# Altium PCB Sonar_Gonderici_PCB2.PcbDoc
Units mm, origin at the board's own origin, x right, y up, seen from the top; angles counter-clockwise.
Board outline 47 x 55 mm, 2 copper layers (Top Layer, Bottom Layer); 8 components, 7 nets, 43 pads, 0 vias.
Unrouted connection lines stored in the file: 2.
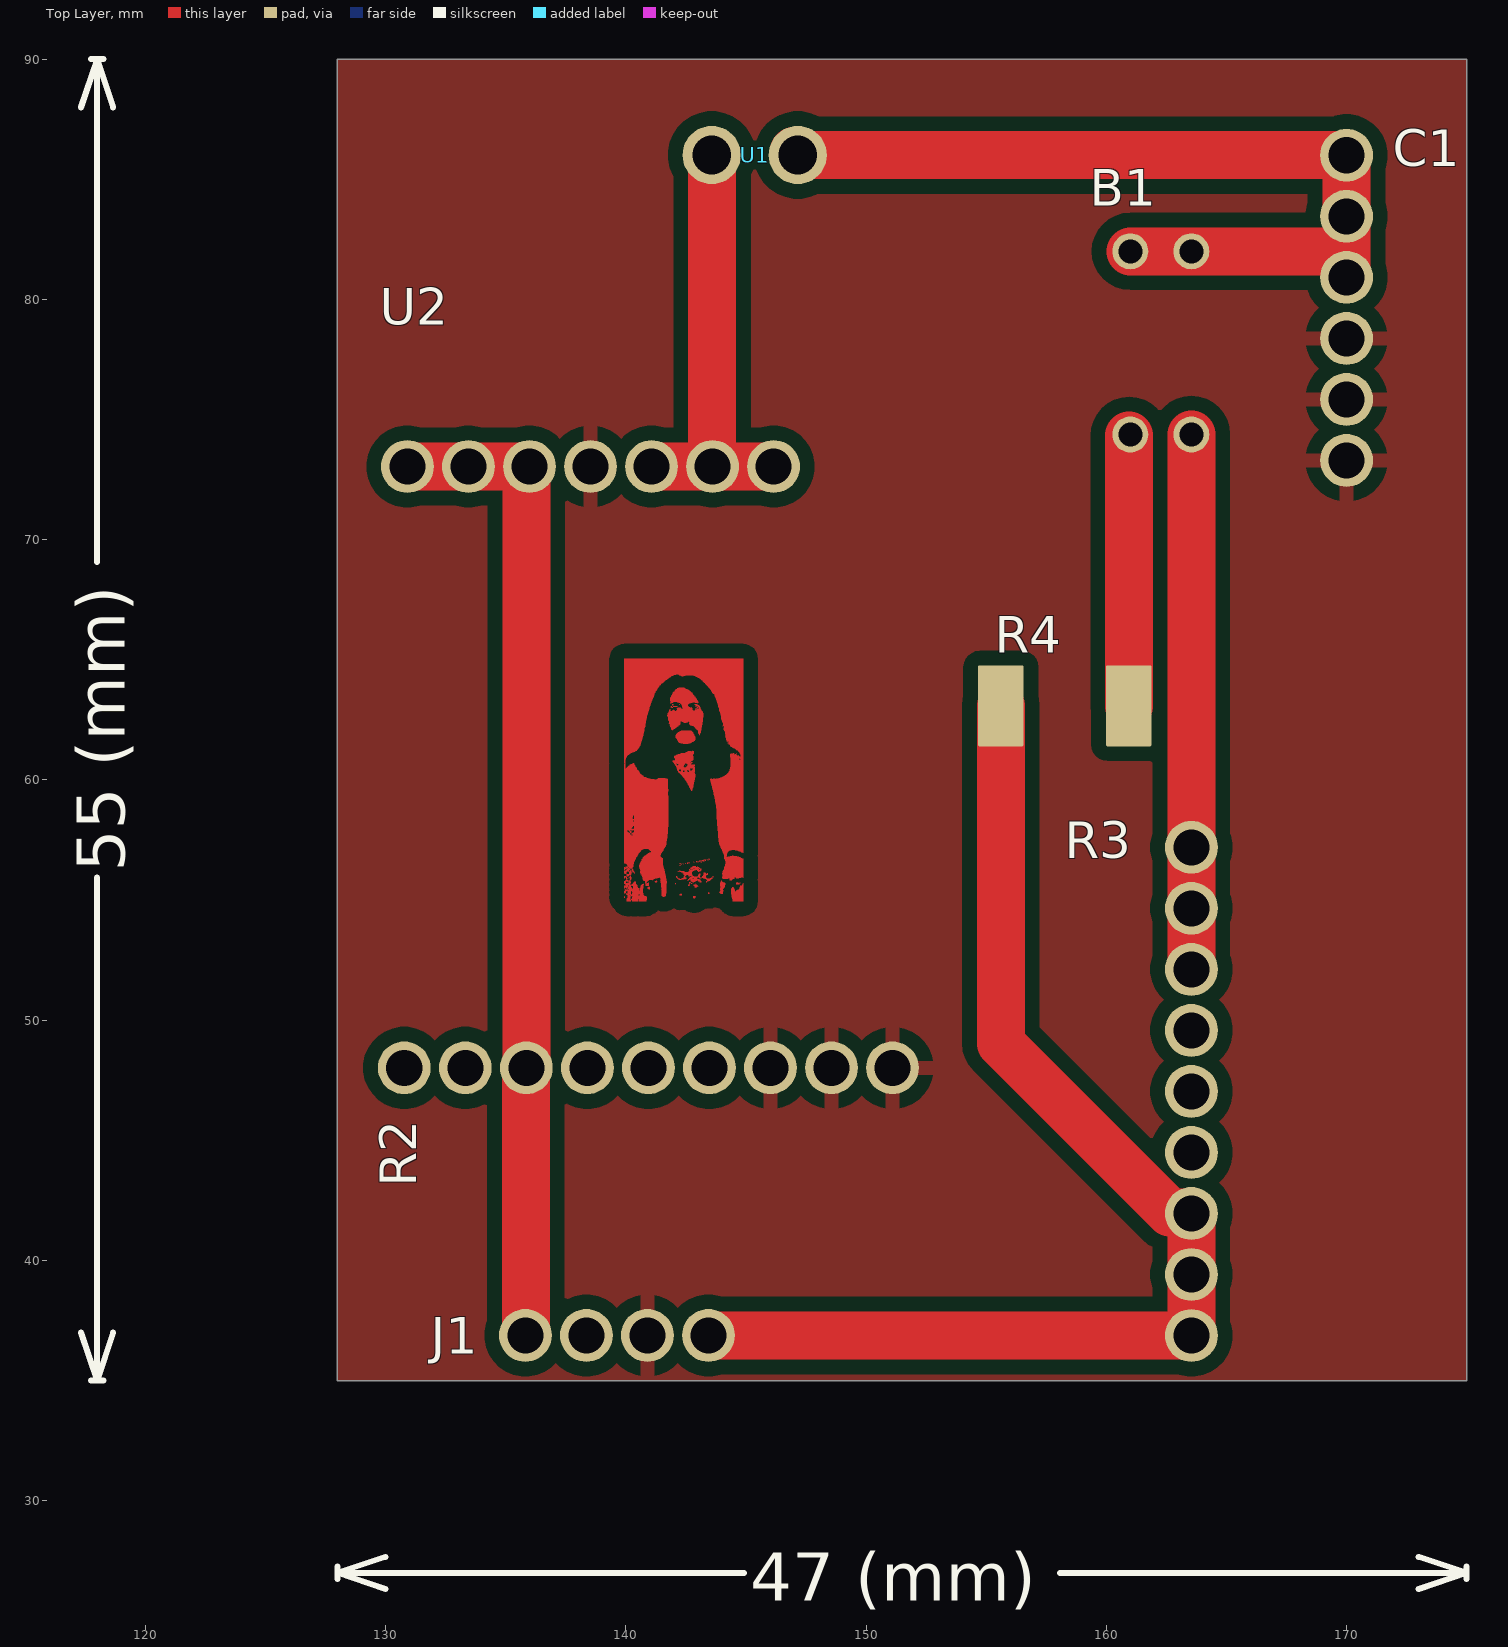
[diagram p0: Top Layer view]
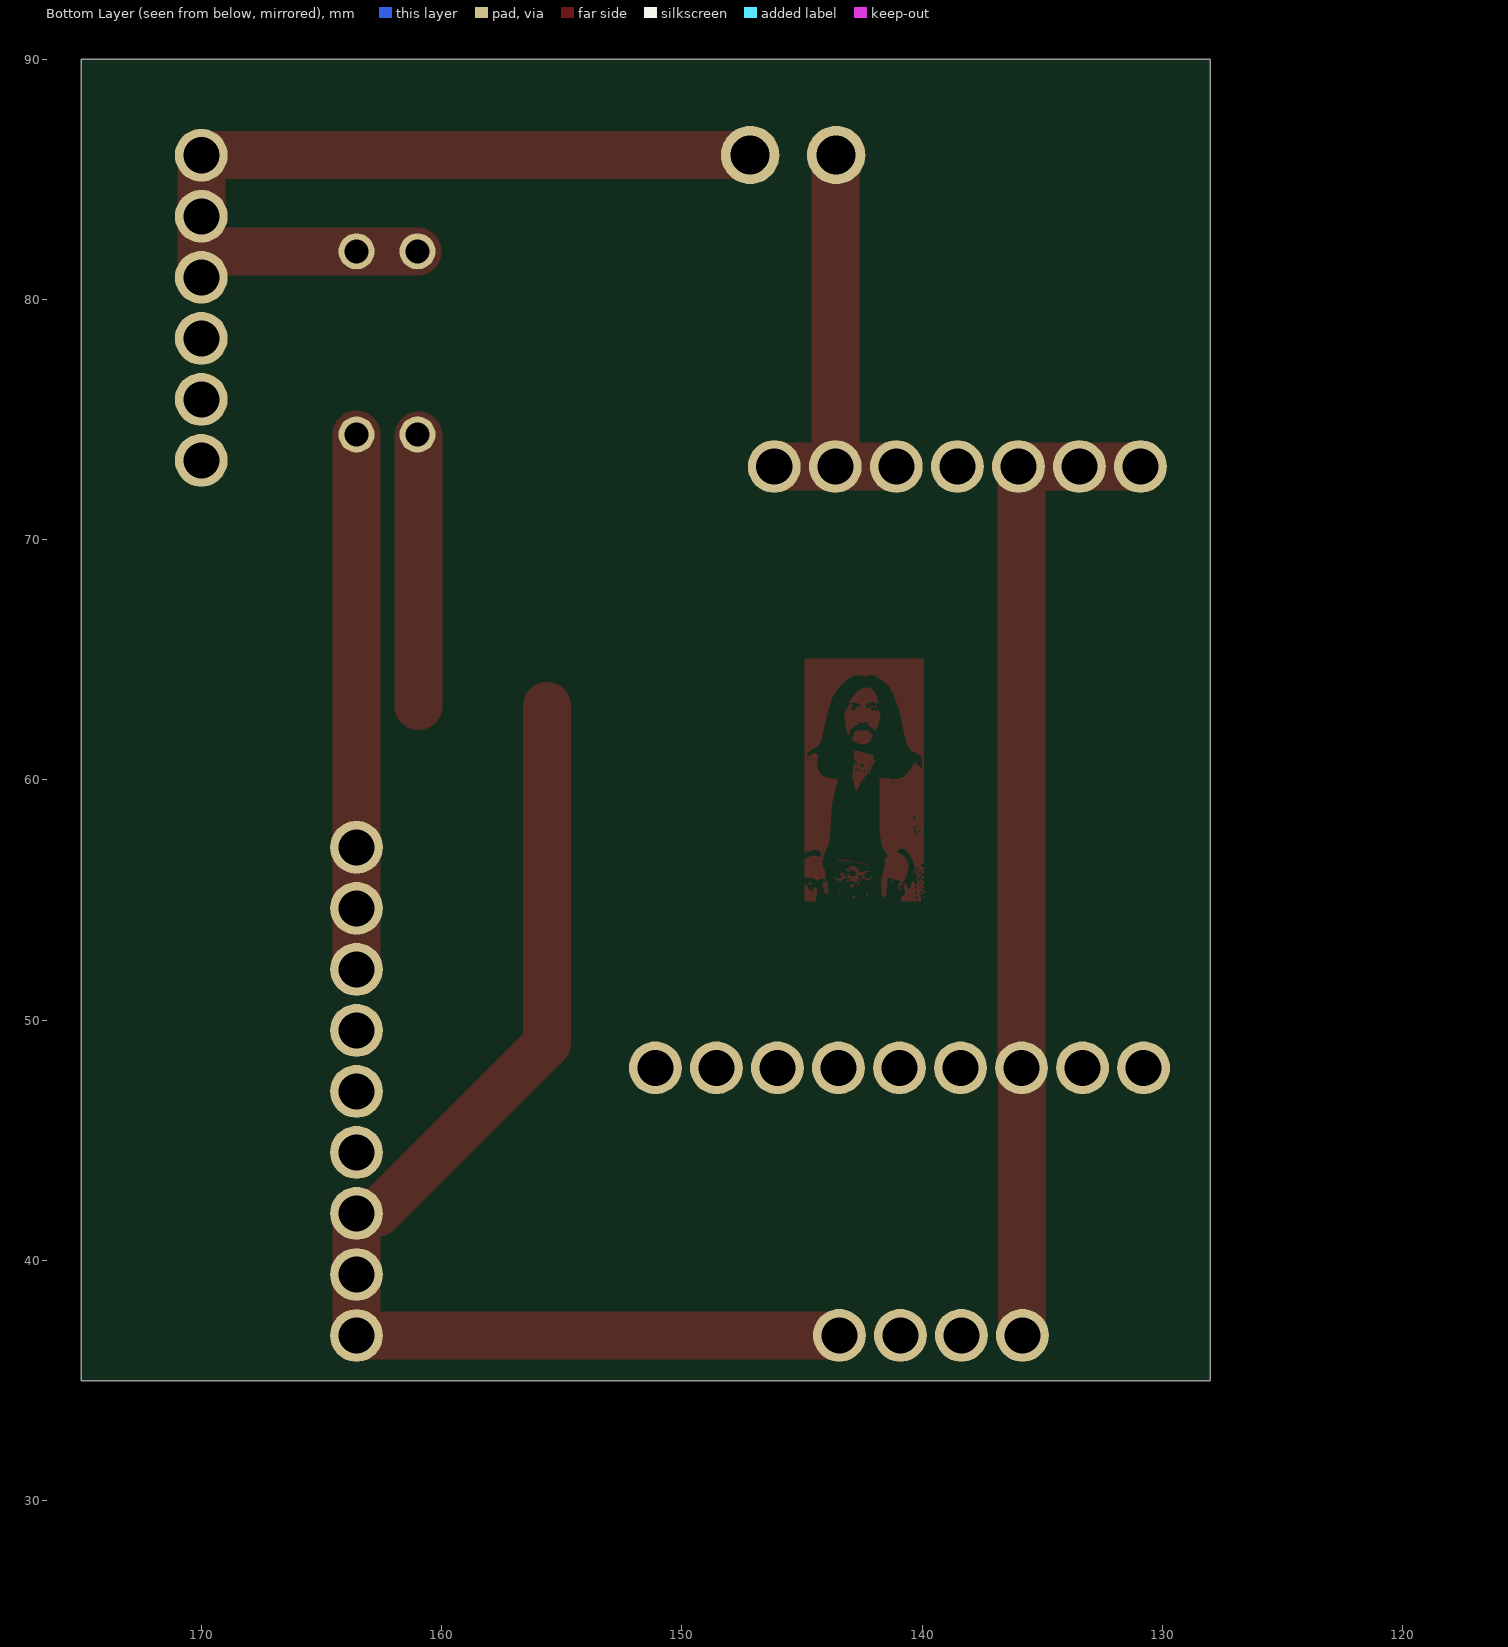
[diagram p1: Bottom Layer view, seen from below]
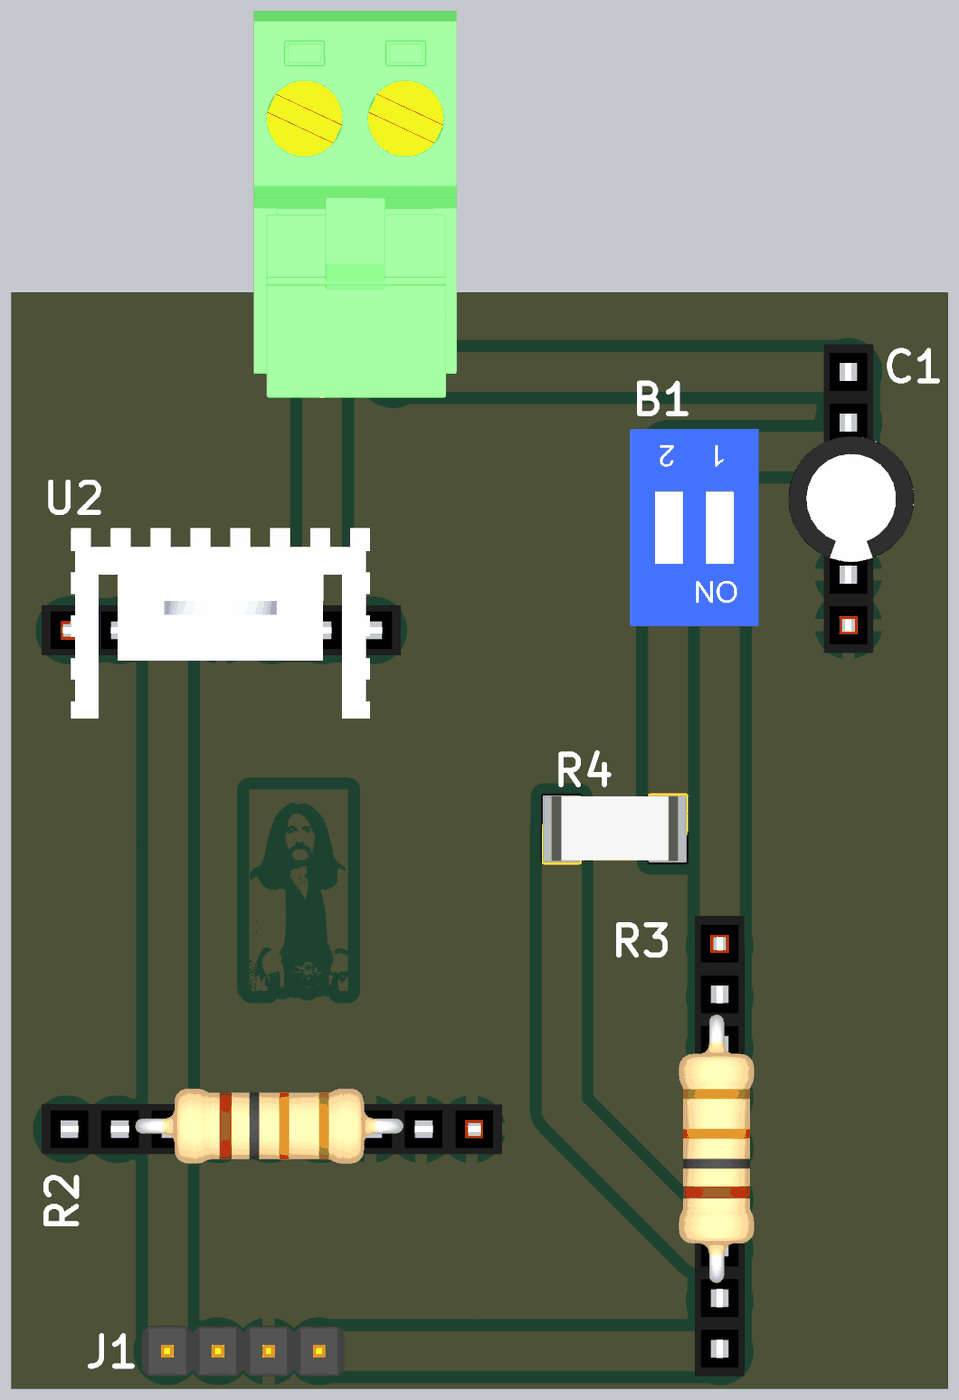
[diagram p2: 3D render of the assembled board from above, using the file's embedded part models]

## Layer stack, top to bottom
Top Solder: solder mask 0.0102, Solder Resist, Dk 3.5
Top Layer: signal copper 0.0356
Dielectric 1: dielectric 0.32, FR-4, Dk 4.8
Bottom Layer: signal copper 0.0356
Bottom Solder: solder mask 0.0102, Solder Resist, Dk 3.5

## Board outline
128,35 128,90 175,90 175,35

## Design rules (kind name [scope] priority, off if disabled: settings)
Clearance [All] p1: gap=0.6 ignorepadtopadclearanceinfootprint=FALSE
PolygonConnect [All] p1: connectstyle=Relief reliefconductorwidth=0.6 reliefentries=4 polygonreliefangle="90 Angle" airgapwidth=0.6
RoutingVias [All] p1: holewidth=0.711 width=1.27 viastyle="Through Hole" minholewidth=0.711 minwidth=1.27 maxholewidth=0.711 maxwidth=1.27
SolderMaskExpansion [All] p1: expansion=0.102 istentingtop=FALSE
Width [All] p1: maxlimit=3 minlimit=1 preferedwidth=1.5 minimp=50.000000 maximp=50.000000 favimp=50.000000
30 further rules are at their usual default settings.

## Classes and differential pairs
component class Sonar_Gonderici_Sheet1: B1 C1 J1 R2 R3 R4 U1

## Components (designator, comment, footprint, x,y, rotation, side; value= is the part's Value field where it differs from the comment)
B1 "2 Pin Switch" "2 Pin Switch" 163.54,74.38 r180 top
C1 "Tht Cap" "THT CAP POL" 170,83.46 r270 top
J1 "Header" Header 135.823,36.882 r0 top
R2 "Tht Res" "THT Res" 148.561,48.019 r180 top
R3 "Tht Res" "THT Res" 163.54,54.658 r270 top
R4 "Smd Res" RESC1005X40 155.612,63.083 r0 top
U1 "Transformator" Transfornator 147.158,86.01 r180 top
U2 "Logic_Mosfet" Logic_Mosfet 138.532,73.044 r0 top

## Footprints (in the part's own frame and the unit in brackets; to place one, negate y for a bottom-side part, rotate by r counter-clockwise, add the part's x,y. Pads: shape width x height; smd on the part's side, far side on the other; paste and mask are expansions set on the pad)
"2 Pin Switch" [mm]
  round 1.5 hole 1: 1(0,0) 2(2.54,0) 3(0,-7.62) 4(2.54,-7.62)
  body extent -1.95,-8.76 4.49,1.14, height 6.7
Header [mm]
  round 2.2 hole 1.5: 1(0,0) 2(2.54,0) 3(5.08,0) 4(7.62,0)
  body extent -1.27,-1.27 8.89,1.27, height 9.5
Logic_Mosfet [mm]
  round 2.2 hole 1.5: 1(-7.62,0) 2(-5.08,0) 3(-2.54,0) 4(0,0) 5(2.54,0) 6(5.08,0) 7(7.62,0)
  body extent -9.02,-4.42 9.01,5.13, height 29.8
RESC1005X40 [mm]
  rrect7% 1.9x3.37 smd: 1(0,0) 2(5.32,0)
  body extent -0.51,-1.61 5.84,1.65, height 0.58
"THT CAP POL" [mm]
  round 2.2 hole 1.5: 1(-2.54,0) 2(0,0) 3(2.54,0) 4(5.08,0) 5(7.62,0) 6(10.16,0)
  body extent -3.93,-3.02 11.56,3.3, height 8.5
"THT Res" [mm]
  round 2.2 hole 1.5: 1(-2.54,0) 2(0,0) 3(2.54,0) 4(5.08,0) 5(7.62,0) 6(10.16,0) 7(12.7,0) 8(15.24,0) 9(17.78,0)
  body extent -4.06,-2.03 19.05,1.72, height 15.38
Transfornator [mm]
  round 2.43 hole 1.62: 1(0,0) 2(3.58,0)
  body extent -3.17,-18.1 6.99,1.3, height 13.95

## Part data
B1: ComponentLink1Description="Satın Alma Linki", ComponentLink1URL=https://www.direnc.net/2-pin-dip-switch
C1: ComponentLink10Description="Satın Alma Linki", ComponentLink10URL=https://www.direnc.net/47uf16v, ComponentLink11Description="Satın Alma Linki", ComponentLink11URL=https://www.direnc.net/2-pin-508mm-90-gecmeli-takim-klemens, ComponentLink12Description="Satın Alma Linki", ComponentLink12URL=https://www.direnc.net/2-pin-508mm-90-erkek-gecmeli-yesil-klemens-1
J1: ComponentLink1Description="Satın Alma Linki", ComponentLink1URL=https://www.direnc.net/1x40-precision-disi-header, ComponentLink2Description=Datasheet, ComponentLink2URL=https://www.signal.com.tr/pdf/cat/PH1S15_17_25-2XX-L_U.pdf
R2 R3: ComponentLink10Description="Satın Alma Linki", ComponentLink10URL=https://www.robolinkmarket.com/1-4w-4r7-direnc-paketi-10-adet?_sgm_campaign=fcs_9ec70268bc000&_sgm_source=5399%7Cproduct&_sgm_action=search&_sgm_term=diren%C3%A7, ComponentLink11Description="Satın Alma Linki", ComponentLink11URL=https://www.direnc.net/2-pin-508mm-90-erkek-gecmeli-yesil-klemens-1, ComponentLink12Description="Satın Alma Linki", ComponentLink12URL=https://www.direnc.net/2-pin-508mm-90-gecmeli-takim-klemens
R4: ComponentLink10Description="Satın Alma Linki", ComponentLink10URL=https://www.direnc.net/47k-5-1w-2512-smd-direnc, ComponentLink11Description=Datasheet, ComponentLink11URL=https://www.resistor.com/assets/pdf/2512std.pdf
U1: ComponentLink1Description="Satın Alma Linki", ComponentLink1URL=https://www.direnc.net/2-pin-508mm-90-erkek-gecmeli-yesil-klemens-1, ComponentLink3Description="Satın Alma Linki", ComponentLink3URL=https://www.direnc.net/2-pin-508mm-90-gecmeli-takim-klemens
U2: ComponentLink1Description="Satın Alma Linki", ComponentLink1URL=https://www.robotistan.com/buz101l-29a-50v-mosfet-logl-logic-level-to220?language=tr&h=3cb70a68, ComponentLink2Description="Satın Alma Linki", ComponentLink2URL=https://www.robolinkmarket.com/buz101l-29a-50v-mosfet-logl-logic-level-to220-mosfet, ComponentLink3Description=Datasheet, ComponentLink3URL=https://www.robolinkmarket.com/Data/EditorFiles/PDF/buz101l.pdf, ComponentLink4Description="Satın Alma Linki", ComponentLink4URL=https://www.direnc.net/3-pin-508mm-disi-gecmeli-klemens-11943, ComponentLink5Description="Satın Alma Linki", ComponentLink5URL=https://www.direnc.net/3-pin-508mm-90-gecmeli-takim-klemens, ComponentLink6Description="Satın Alma Linki", ComponentLink6URL=https://www.direnc.net/irlz44n-d2pak-smd-n-kanal-mosfet, ComponentLink7Description=Datasheet, ComponentLink7URL=https://pdf.direnc.net/upload/irlz44nslpbf-datasheet.pdf

## Nets (pads, with @x,y where several pads share a name; then routed paths per layer and width w, separated by ;. In a path a pad name is that pad's centre, name@x,y a point inside that pad or via, vN(x,y) a via of type N, cw(c..) or ccw(c..) an arc to the next point about the centre after c; other vN are vias at no path point)
+5: J1.4 R3.7 R3.8 R3.9 R4.1 | length 50.1
  Top Layer w2: J1.4 J1.4 146.235,36.88 ; 146.233,36.882 146.235,36.88 ; R4.1 155.612,49.032 162.648,41.996 163.502,41.996 R3.7 R3.8 R3.9 163.538,36.88 146.235,36.88
GND: C1.4 C1.5 C1.6 J1.3 R2.1 R2.2 R2.3 U2.4
NetB1_1: B1.1 R3.1 R3.2 R3.3 | length 22.3
  Top Layer w2: R3.3 R3.2 R3.1 B1.1
NetB1_2: B1.2 R4.2 | length 11.3
  Top Layer w2: R4.2@160.954,63.083 B1.2@160.954,74.334
NetB1_3: B1.3 B1.4 C1.1 C1.2 C1.3 U1.1 | length 37.3
  Top Layer w2: U1.1@146.998,86.171 U1.1 U1.1@147.163,86.005 ; U1.1@147.181,85.987 U1.1@147.163,86.005 ; B1.4 B1.3 169.81,82 170,82.19 ; C1.1@169.977,86.023 C1.1@169.995,86.005 ; C1.3 170,82.19 ; U1.1@147.163,86.005 C1.1@169.995,86.005 ; C1.1@169.995,86.005 C1.1 C1.2 170,82.19
NetJ1_1: J1.1 R2.7 R2.8 R2.9 U2.1 U2.2 U2.3 | length 41.1
  Top Layer w2: U2.1 U2.2 U2.3 U2.3@135.992,72.99 ; J1.1 135.842,36.901 135.842,48 R2.7 U2.3@135.861,72.859
NetU1_2: U1.2 U2.5 U2.6 U2.7 | length 18.1
  Top Layer w2: U2.5 U2.6 ; U1.2 143.595,85.993 143.595,73.061 U2.6 ; U2.7 U2.6
pads on no net: J1.2 R2.4 R2.5 R2.6 R3.4 R3.5 R3.6

## Polygon pours and split planes (outlines as drawn)
GND on Top Layer "GND_L01_P000" (solid, pour order 0): 128,90 175,90 175,35 128,35

## Other copper
Top Layer:
  drawing of 66 lines, arcs and shapes, not listed

## Silkscreen, mask and mechanical layers (free items; w line width, h text height)
Top Overlay:
  lines w0.254: 117.333,37 118,35 ; 117.333,88 118,90 ; 117.746,35 118.254,35 ; 117.746,90 118.254,90 ; 118,55.929 118,35 ; 118,69.071 118,90 ; 118.667,37 118,35 ; 118.667,88 118,90 ; 128,26.746 128,27.254 ; 130,26.333 128,27 ; 130,27.667 128,27 ; 144.929,27 128,27 ; 158.071,27 175,27 ; 173,26.333 175,27 ; 173,27.667 175,27 ; 175,26.746 175,27.254
  text "55 (mm)" at 119.152,56.183 h2 r90
  text "47 (mm)" at 145.183,25.848 h2